# EAGLE board WB-test-V1 (EAGLE 9.6.2)
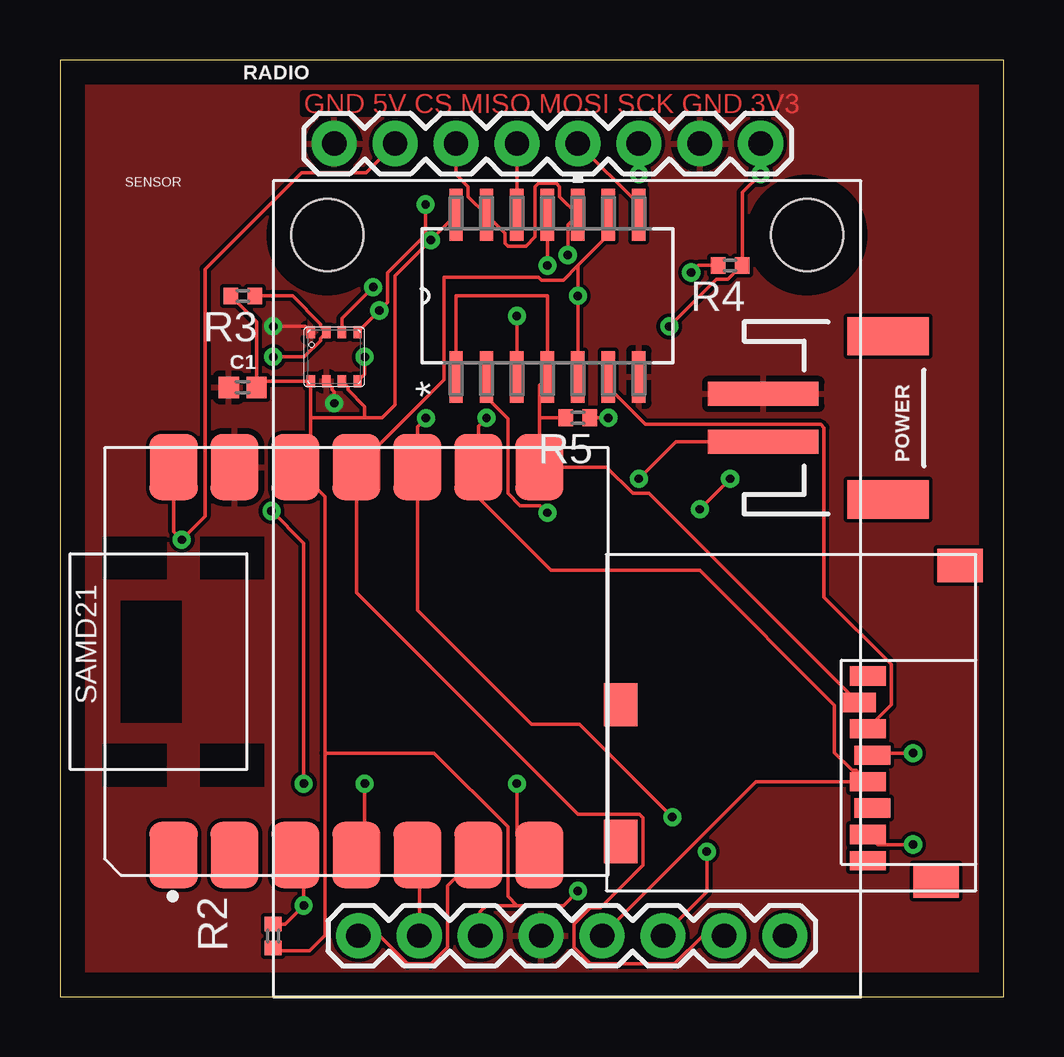
[diagram p0: board, top side]
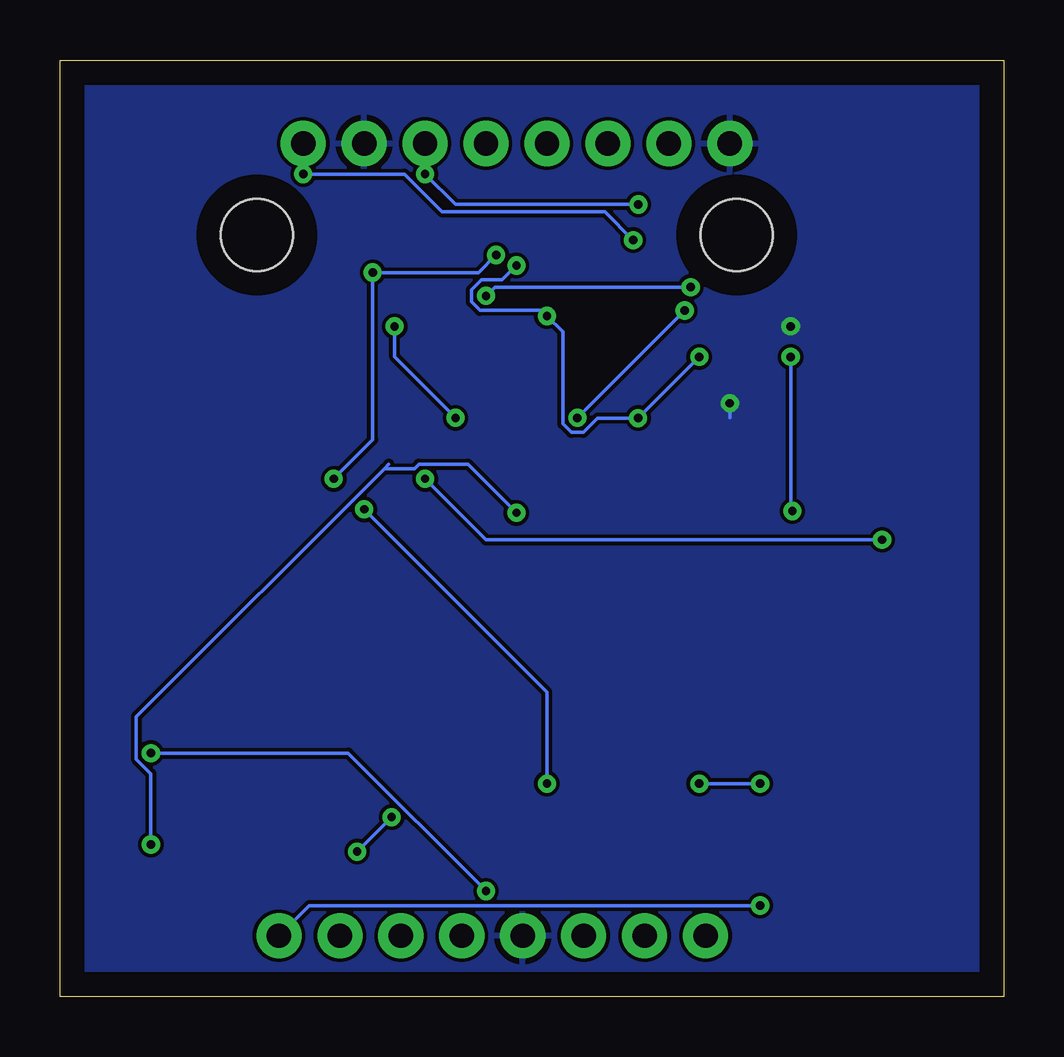
[diagram p1: board, bottom side, seen from below]

Size 39.35 x 39.04 mm. Coordinates in mm from the lower left corner, seen from the top.
Outline: 0,0 39.35,0 39.35,39.04 0,39.04 0,0
Copper layers (1*16): Top 0.035mm / dielectric 1.5mm / Bottom 0.035mm
Design rules "default": minimum track width 6mil, minimum drill 0.35mm, track to track 6mil, track to pad 6mil, pad to pad 6mil, via to via 6mil, smd to smd 6mil, copper to edge 40mil, drill to drill 6mil, minimum pad ring 10mil, minimum via ring 8mil, stop-mask expansion 4mil, vias tented up to drill 0mil, thermal gap 10mil

## Footprints (pad centres in the part's own frame; a part is rotated, then mirrored left to right if it is on the bottom)
0402 = smd 0.85 x 0.9: 1 -0.58,0; 2 0.58,0
ARDUCAM_MINI = drill 1.016 pad 1.88: CS 21.33,2.55; GND 11.17,2.55; MISO 16.25,2.55; MOSI 18.79,2.55; SCK 13.71,2.55; SCL 3.55,2.55; SDA 6.09,2.55; VCC 8.63,2.55 | hole 3: 22.25,31.75; 2.25,31.75
JST-2-SMD = smd 1 x 4.6: 1 -1,-3.7; 2 1,-3.7 | smd 1.6 x 3.4: NC1 -3.4,1.5; NC2 3.4,1.5
R0402 = smd 0.6 x 0.7: 1 -0.5,0; 2 0.5,0
1X08 = drill 1.016 pad 1.88: 1 0,0; 2 2.54,0; 3 5.08,0; 4 7.62,0; 5 10.16,0; 6 12.7,0; 7 15.24,0; 8 17.78,0
MOUDLE14P-2.54-21X17.8MM = smd 2.75 x 2: 1 0.835,18.12; 2 0.835,15.58; 3 0.835,13.04; 4 0.835,10.5; 5 0.835,7.96; 6 0.835,5.42; 7 0.835,2.88; 8 17,2.88; 9 17,5.42; 10 17,7.96; 11 17,10.5; 12 17,13.04; 13 17,15.58; 14 17,18.12
SDREAD = smd 0.8 x 1.5: CS 0.84,-2.79; GND -3.56,-3.39; MISO -4.66,-3.19; MOSI -0.26,-3.19; SCK -2.46,-3.19; VDD -1.36,-3.39; X1 1.94,-3.19; X2 -5.76,-3.19 | smd 1.4 x 1.9: P$1 6.55,-7.04; P$2 -6.6,-6.04 | smd 1.8 x 1.4: P$3 -4.95,7.11; P$4 0.75,7.11
BME280 = smd 0.35 x 0.5: 1 0.975,-1.025; 2 0.325,-1.025; 3 -0.325,-1.025; 4 -0.975,-1.025; 5 -0.975,1.025; 6 -0.325,1.025; 7 0.325,1.025; 8 0.975,1.025
NS14 = smd 2.159 x 0.559: 1 -3.378,3.81; 2 -3.378,2.54; 3 -3.378,1.27; 4 -3.378,0; 5 -3.378,-1.27; 6 -3.378,-2.54; 7 -3.378,-3.81; 8 3.378,-3.81; 9 3.378,-2.54; 10 3.378,-1.27; 11 3.378,0; 12 3.378,1.27; 13 3.378,2.54; 14 3.378,3.81

## Placement (x,y rotation side)
C1  0.1uF  [0402]  7.62,25.4 0 top
CAM  ARDUCAM_MINI  [ARDUCAM_MINI]  8.89,0 0 top
POWER  [JST-2-SMD]  33.02,24.13 270 top
R2  [R0402]  8.89,2.54 90 top
R3  [R0402]  7.62,29.21 180 top
R4  [R0402]  27.94,30.48 180 top
R5  [R0402]  21.59,24.13 180 top
RADIO  [1X08]  11.43,35.56 0 top
SAMD21  [MOUDLE14P-2.54-21X17.8MM]  22.86,5.08 90 top
SD  SD_READER  [SDREAD]  30.48,11.43 90 top
SENSOR  BME280  [BME280]  11.43,26.67 180 top
U1  SN74LVC125ANSR  [NS14]  20.32,29.21 90 top

## Library data of the parts
C1 = SparkFun-Capacitors; PROD_ID: CAP-12416
CAM SD = project-library
POWER = SparkFun-Connectors; PROD_ID: CONN-11443; SF_ID: PRT-08612
R2-R5 = rcl; SPICEPREFIX: R
RADIO = SparkFun-Connectors; PROD_ID: CONN-08438
SAMD21 = Seeeduino-XIAO-footprint-eagle
SENSOR = bosch-bme280
U1 = SN74LVC125ANSR; COPYRIGHT: Copyright (C) 2024 Ultra Librarian. All rights reserved.; MANUFACTURER_PART_NUMBER: SN74LVC125ANSR; MFR_NAME: Texas Instruments

## Nets
3V3: C1.2 CAM.VCC R2.1 R3.2 R4.1 R5.1 RADIO.8 SAMD21.12 SD.VDD SENSOR.6 SENSOR.8 U1.14
5V: POWER.2 RADIO.2 SAMD21.14
CS_BME: R3.1 SAMD21.4 SENSOR.2
CS_CAM: CAM.CS R2.2 SAMD21.3
CS_RAD: R4.2 RADIO.3 SAMD21.7 U1.10 U1.13
CS_SD: R5.2 SAMD21.8 SD.CS U1.1 U1.4
GND: C1.1 CAM.GND POWER.1 RADIO.1 RADIO.7 SAMD21.13 SENSOR.1 SENSOR.7 U1.7
MISO: CAM.MISO SAMD21.10 SENSOR.5 U1.3 U1.11
MISO_RAD: RADIO.4 U1.12
MISO_SD: SD.MISO U1.2
MOSI: CAM.MOSI SAMD21.11 SENSOR.3 U1.5 U1.9
MOSI_RAD: RADIO.5 U1.8
MOSI_SD: SD.MOSI U1.6
N$5: CAM.SDA SAMD21.5
N$6: CAM.SCL SAMD21.6
SCK: CAM.SCK RADIO.6 SAMD21.9 SD.SCK SENSOR.4

## Tracks (layer width: path | path; a pad name or v marks a point on that pad's centre or on a via)
3V3  (via drill 0.35)
  Top 0.152: 10.46,24.13 10.46,22.71 SAMD21.12 11.05,20.85 11.05,10.16 | 10.46,24.13 SENSOR.8 8.45,25.64 C1.2 8.2,28.13 R3.2 | U1.14 v15.46,31.53 13.97,30.05 13.97,24.68 13.42,24.13 12.7,24.13 | RADIO.8 v29.21,34.29 28.44,33.52 R4.1 28.41,30.48 27.84,29.9 27.36,29.9 v25.4,27.94 | SD.VDD 33.96,10.16 v35.56,10.16 | v21.59,4.42 20.98,3.81 19.05,3.81 | 19.05,3.81 17.78,3.81 17.52,3.55 CAM.VCC | 19.05,3.81 18.67,4.19 18.67,7.09 15.6,10.16 11.05,10.16 | R5.1 v22.86,24.13 | 11.76,25.55 SENSOR.6 12,25.4 12,25.3 12.7,24.6 12.7,24.13 | 12.7,24.13 10.46,24.13 | R2.1 9,1.93 10.41,1.93 11.05,2.57 11.05,10.16
  Bottom 0.152: v15.46,31.53 16.64,32.72 23.41,32.72 24.99,34.29 v29.21,34.29 | v35.56,10.16 27.33,10.16 v21.59,4.42 | v22.86,24.13 25.4,26.67 v25.4,27.94
5V  (via drill 0.35)
  Top 0.152: POWER.2 25.67,23.13 v24.13,21.59 | SAMD21.14 4.74,19.39 v5.08,19.05 6.05,20.02 6.05,30.33 10.07,34.34 12.75,34.34 RADIO.2
  Bottom 0.152: v24.13,21.59 21.59,19.05 v5.08,19.05
CS_BME  (via drill 0.35)
  Top 0.152: v8.89,26.67 10.18,26.67 10.86,27.35 10.86,27.45 SENSOR.2 10.86,27.94 10.86,28.04 9.69,29.21 R3.1 | v8.82,20.25 10.16,18.91 v10.16,8.89 | v12.7,8.89 12.7,6.25 SAMD21.4
  Bottom 0.152: v8.89,26.67 8.89,20.32 v8.82,20.25 | v10.16,8.89 v12.7,8.89
CS_CAM  (via drill 0.35)
  Top 0.152: SAMD21.3 10.16,5.58 v10.16,3.81 9.39,3.04 R2.2
  Bottom 0.152: v10.16,3.81 28.96,3.81 CAM.CS
CS_RAD  (via drill 0.35)
  Top 0.152: RADIO.3 16.51,34.27 17.02,33.76 17.02,33.35 U1.13 18.54,31.83 18.54,31.41 18.68,31.28 19.42,31.28 19.81,31.67 19.81,33.76 19.95,33.9 20.69,33.9 20.83,33.76 20.83,33.35 U1.10 21.17,32.17 v21.17,30.92 | SAMD21.7 19.05,6.84 v19.05,8.89 | v26.67,20.32 v27.94,21.59 | R4.2 26.61,30.48 v26.31,30.18
  Bottom 0.152: v19.05,8.89 19.05,12.7 v26.67,20.32 | v21.17,30.92 21.9,30.18 v26.31,30.18 26.31,23.22 v27.94,21.59
CS_SD
  Top 0.152: SD.CS 24.56,20.98 23.88,20.98 22.78,22.08 SAMD21.8 19.98,24.13 | 19.98,24.13 19.98,25.49 U1.4 20.32,29.21 16.51,29.21 U1.1 | R5.2 19.98,24.13
GND  (via drill 0.35)
  Top 0.152: SENSOR.1 10.21,27.94 v8.89,27.94 | SENSOR.7 11.35,25.4 11.35,25.3 11.43,25.22 v11.43,24.74
  Bottom 0.152: v11.43,24.74 11.43,24.13
  pour Top: 0,38.1 39.37,38.1 39.37,0 0,0
  pour Bottom: 0,39.37 39.37,39.37 39.37,0 0,0
MISO  (via drill 0.35)
  Top 0.152: v15.25,24.12 14.9,23.76 SAMD21.10 14.9,16.11 19.65,11.35 21.67,11.35 v25.53,7.49 | v12.7,26.67 12.7,25.94 SENSOR.5 | v20.32,30.48 U1.11 | v26.96,6.06 26.96,4.37 CAM.MISO | v19.05,28.37 U1.3
  Bottom 0.152: v12.7,26.67 v15.25,24.12 16.94,24.12 17.53,23.52 18.03,23.52 18.39,23.88 18.39,27.71 v19.05,28.37 19.28,28.6 21.84,28.6 22.2,28.96 22.2,29.46 21.78,29.88 20.92,29.88 v20.32,30.48 | v25.53,7.49 v26.96,6.06
MISO_RAD
  Top 0.152: RADIO.4 U1.12
MISO_SD  (via drill 0.35)
  Top 0.152: v35.56,6.35 34.09,6.35 SD.MISO | v20.32,20.17 20.02,20.48 19.18,20.48 18.67,20.99 18.67,24.1 17.78,24.99 U1.2
  Bottom 0.152: 25.65,22.2 25.83,22.02 | 25.83,22.02 36.17,11.68 36.17,9.91 35.56,9.3 v35.56,6.35 | 25.83,22.02 24.56,22.02 24.38,22.2 22.34,22.2 v20.32,20.17
MOSI  (via drill 0.35)
  Top 0.152: U1.5 v21.59,29.21 21.59,30.48 | 21.59,30.48 22.86,31.75 U1.9 | SENSOR.3 11.76,28.27 v13.06,29.57 | CAM.MOSI 26.79,2.55 25.62,1.38 22.12,1.38 21.43,2.07 21.43,3.03 22.12,3.72 22.53,3.72 24.3,5.49 24.3,7.47 24.15,7.62 21.59,7.62 12.36,16.85 SAMD21.11 16,25.72 16,29.98 19.96,29.98 20.07,29.87 20.98,29.87 21.59,30.48
  Bottom 0.152: v13.06,29.57 21.23,29.57 v21.59,29.21
MOSI_RAD
  Top 0.152: RADIO.5 24.13,33.02 U1.8
MOSI_SD
  Top 0.152: SD.MOSI 33.67,11.2 34.65,12.18 34.65,13.87 31.85,16.66 31.85,23.73 31.72,23.86 24.4,23.86 22.86,25.4 U1.6
N$5
  Top 0.152: SAMD21.5 14.98,5.83 CAM.SDA
N$6
  Top 0.152: CAM.SCL 13.33,2.55 14.5,1.38 15.46,1.38 16.15,2.07 16.15,4.62 SAMD21.6
SCK  (via drill 0.35)
  Top 0.152: RADIO.6 v24.13,34.29 | v15.24,33.02 15.24,31.75 13.67,30.17 13.67,28.95 v13.31,28.6 SENSOR.4 | CAM.SCK 29.02,8.97 SD.SCK 33.2,9.44 33.02,9.44 32.29,10.18 32.29,12.16 26.67,17.78 20.47,17.78 17.44,20.81 SAMD21.9 17.44,23.79 v17.78,24.13
  Bottom 0.152: v24.13,34.29 22.86,33.02 v15.24,33.02 | v17.78,24.13 v13.31,28.6

## Text on the board
Top: GND 5V CS MISO MOSI SCK GND 3V3